# Altium PCB PCB.PcbDoc (part 2 of 2)
Units mil, origin at the board's own origin, x right, y up, seen from the top; angles counter-clockwise.
Board outline 1675.38 x 2135.38 mil, 2 copper layers (Top Layer, Bottom Layer), stack 54.768 mil thick; 71 components, 62 nets, 275 pads, 248 vias.
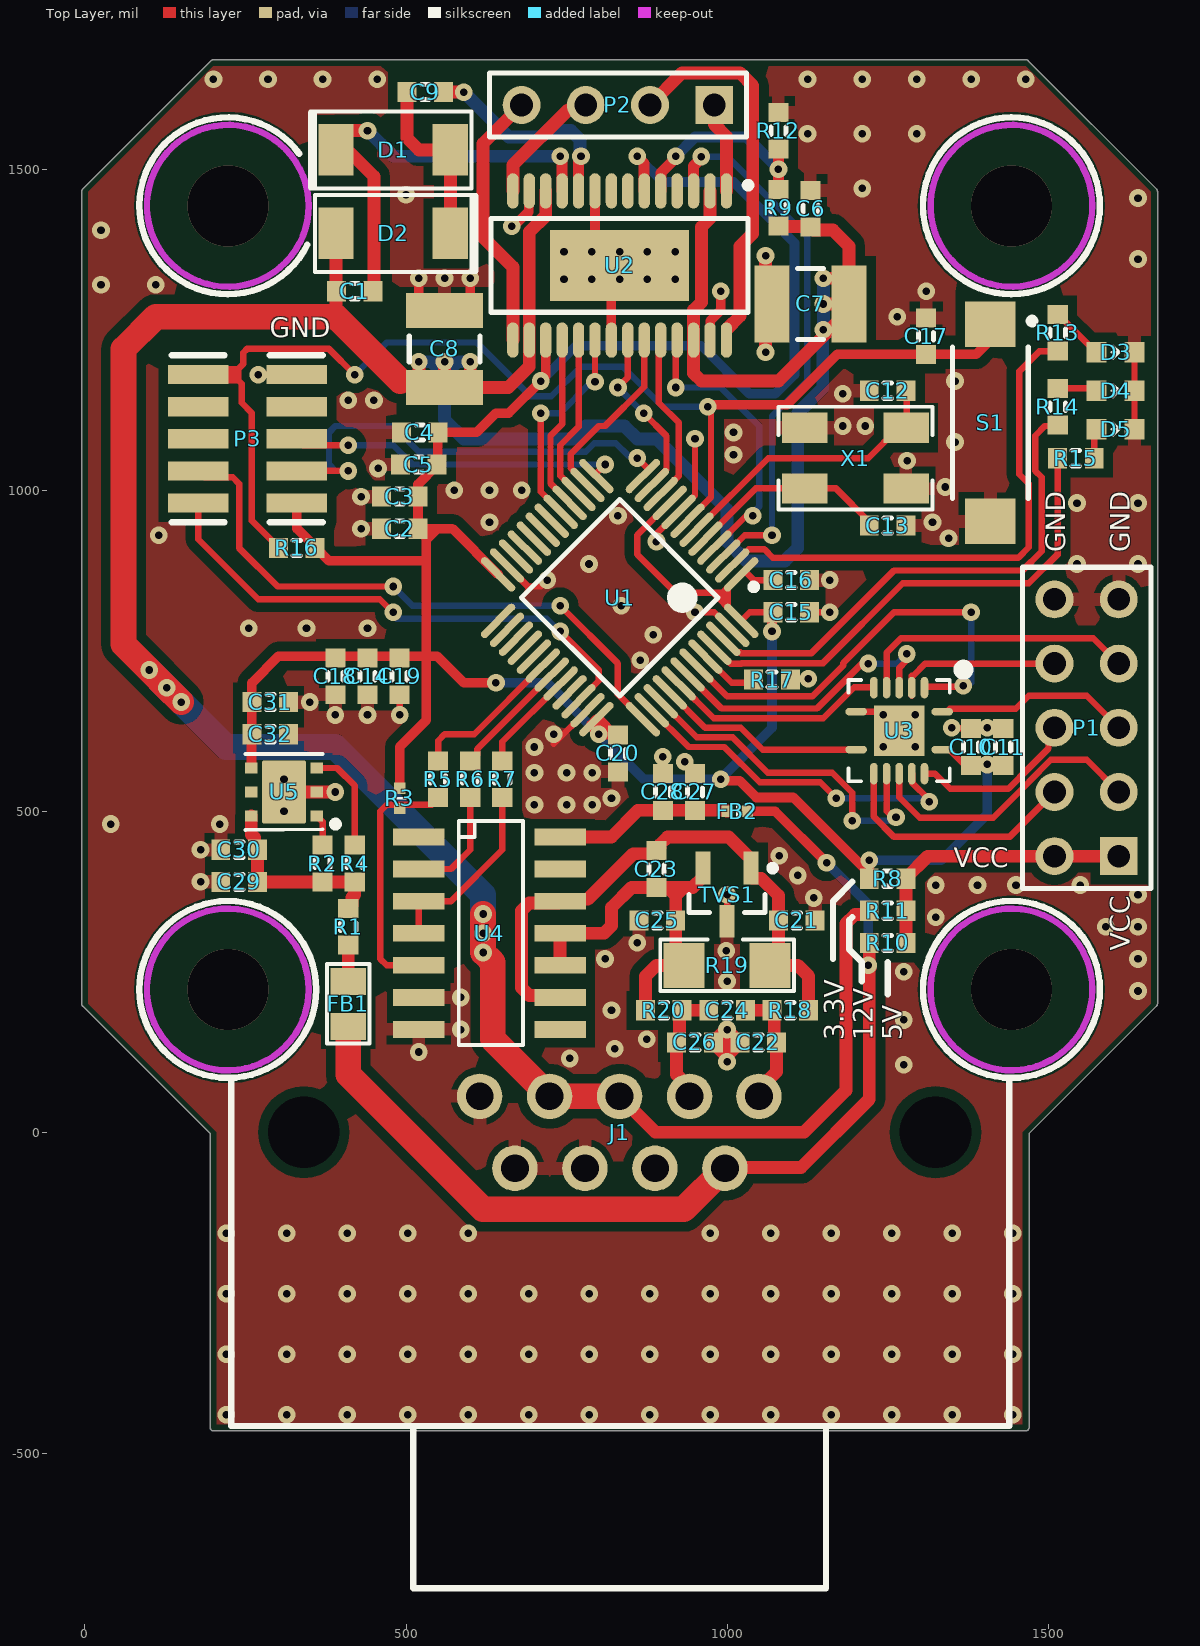
[diagram p0: Top Layer view]

## Polygon pours and split planes (outlines as drawn) (continued)
GND on Bottom Layer "NONET_L02_P-001" (solid, remove dead copper, pour order 2): 200,1660 5,1465 5,200 205,0 205,-455 1460,-455 1460,0 1660,200 1660,1465 1465,1660

## Keep-outs
Keep-Out Layer:
  circle w10: c1442.91,1442.91 r125.98
  circle w10: c222.44,1442.91 r125.98
  circle w10: c222.44,222.44 r125.98
  circle w10: c1442.91,222.44 r125.98

## Silkscreen, mask and mechanical layers (free items; w line width, h text height)
Top Overlay:
  circle w10: c1442.91,1442.91 r137.8
  circle w10: c222.44,222.44 r137.8
  circle w10: c1442.91,222.44 r137.8
  lines w10: 333.77,1524.11 ccw(c222.44,1442.91) 346.02,1381.96 ; 1165,270 1165,360 1195,390 ; 1195,335 1190,330 1190,285 1210,265 1210,235 ; 1250,215 1250,265
  text "GND" at 288,1238 h30
  text "GND" at 1527,903 h30 r90
  text "GND" at 1627,903 h30 r90
  text "VCC" at 1353,413 h30
  text "VCC" at 1627,283 h30 r90
  text "3.3V" at 1182,143 h30 r90
  text "12V" at 1227,143 h30 r90
  text "5V" at 1272,143 h30 r90
Bottom Overlay:
  text "KNE ANG 2020" at 1390,1140 h100
  text "STEPPER_DRIVER_V1" at 1640,961.66 h100
  text "https://github.com/witek117" at 1400,811.66 h50
Mechanical 1:
  lines w10: 0,1465.35 0,200 200,0 200,-460 1465.35,-460 1465.35,0 ; 0,1465.35 200,1665.35 ; 0,1465.35 200,1665.35 ; 200,1665.35 1465.35,1665.35 ; 1465.35,0 1665.35,200 ; 1465.35,0 1665.35,200 ; 1465.35,1665.35 1665.35,1465.35 ; 1465.35,1665.35 1665.35,1465.35 ; 1665.35,200 1665.35,1465.35

## Text inside footprints (layer, text, board x,y; h text height)
C1: Mechanical 17 "d" at 455,1315 h10 r180; Mechanical 19 "-" at 455,1315 h10 r180
C2: Mechanical 17 "d" at 525,945 h10 r180; Mechanical 19 "-" at 525,945 h10 r180
C3: Mechanical 17 "d" at 525,995 h10 r180; Mechanical 19 "-" at 525,995 h10 r180
C4: Mechanical 17 "d" at 556.46,1095 h10 r180; Mechanical 19 "-" at 556.46,1095 h10 r180
C5: Mechanical 17 "d" at 555,1045 h10 r180; Mechanical 19 "-" at 555,1045 h10 r180
C6: Mechanical 17 "d" at 1135,1403.54 h10 r90; Mechanical 19 "-" at 1135,1403.54 h10 r90
C7: Mechanical 17 "d" at 1190,1280 h20 r180; Mechanical 19 "-" at 1190,1320 h20 r180
C8: Mechanical 17 "d" at 550,1160 h20 r90; Mechanical 19 "-" at 590,1160 h20 r90
C9: Mechanical 17 "d" at 495,1615 h10; Mechanical 19 "-" at 495,1615 h10
C10: Mechanical 17 "d" at 1385,565 h10 r90; Mechanical 19 "-" at 1385,565 h10 r90
C11: Mechanical 17 "d" at 1435,565 h10 r90; Mechanical 19 "-" at 1435,565 h10 r90
C12: Mechanical 17 "d" at 1285,1160 h10 r180; Mechanical 19 "-" at 1285,1160 h10 r180
C13: Mechanical 17 "d" at 1215,940 h10; Mechanical 19 "-" at 1215,940 h10
C14: Mechanical 17 "d" at 435,745 h10 r270; Mechanical 19 "-" at 435,745 h10 r270
C15: Mechanical 17 "d" at 1065,805 h10; Mechanical 19 "-" at 1065,805 h10
C16: Mechanical 17 "d" at 1065,855 h10; Mechanical 19 "-" at 1065,855 h10
C17: Mechanical 17 "d" at 1315,1205 h10 r90; Mechanical 19 "-" at 1315,1205 h10 r90
C18: Mechanical 17 "d" at 385,745 h10 r270; Mechanical 19 "-" at 385,745 h10 r270
C19: Mechanical 17 "d" at 485,745 h10 r270; Mechanical 19 "-" at 485,745 h10 r270
C20: Mechanical 17 "d" at 825,625 h10 r270; Mechanical 19 "-" at 825,625 h10 r270
C21: Mechanical 17 "d" at 1073.54,325 h10; Mechanical 19 "-" at 1073.54,325 h10
C22: Mechanical 17 "d" at 1083.54,145 h10 r180; Mechanical 19 "-" at 1083.54,145 h10 r180
C23: Mechanical 17 "d" at 885,445 h10 r270; Mechanical 19 "-" at 885,445 h10 r270
C24: Mechanical 17 "d" at 1035,195 h10 r180; Mechanical 19 "-" at 1035,195 h10 r180
C25: Mechanical 17 "d" at 926.46,335 h10 r180; Mechanical 19 "-" at 926.46,335 h10 r180
C26: Mechanical 17 "d" at 915,135 h10; Mechanical 19 "-" at 915,135 h10
C27: Mechanical 17 "d" at 955,495 h10 r90; Mechanical 19 "-" at 955,495 h10 r90
C28: Mechanical 17 "d" at 905,495 h10 r90; Mechanical 19 "-" at 905,495 h10 r90
C29: Mechanical 17 "d" at 275,395 h10 r180; Mechanical 19 "-" at 275,395 h10 r180
C30: Mechanical 17 "d" at 275,445 h10 r180; Mechanical 19 "-" at 275,445 h10 r180
C31: Mechanical 17 "d" at 253.54,665 h10; Mechanical 19 "-" at 253.54,665 h10
C32: Mechanical 17 "d" at 253.54,615 h10; Mechanical 19 "-" at 253.54,615 h10
D1: Mechanical 17 "d" at 375,1490 h15; Mechanical 19 "-" at 375,1490 h15
D2: Mechanical 17 "d" at 585,1440 h15 r180; Mechanical 19 "-" at 585,1440 h15 r180
D3: Mechanical 17 "d" at 1640,1220 h10 r180; Mechanical 19 "-" at 1640,1220 h10 r180
D4: Mechanical 17 "d" at 1640,1160 h10 r180; Mechanical 19 "-" at 1640,1160 h10 r180
D5: Mechanical 17 "d" at 1640,1100 h10 r180; Mechanical 19 "-" at 1640,1100 h10 r180
FB1: Mechanical 17 "d" at 430,155 h10 r90; Mechanical 19 "-" at 430,155 h10 r90
FB2: Mechanical 17 "d" at 1030.88,504.92 h10 r180; Mechanical 19 "-" at 1030.75,505 h10 r180
J1: Mechanical 17 "d" at 543.68,-33 h60; Mechanical 19 "-" at 550.68,-170 h60
P1: Mechanical 17 "d" at 1570,385 h30 r90; Mechanical 19 "-" at 1570,385 h30 r90
P2: Mechanical 17 "d" at 1015,1630 h60 r180; Mechanical 19 "-" at 1015,1630 h60 r180
P3: Mechanical 17 "d" at 270,960 h30 r90; Mechanical 19 "-" at 270,960 h30 r90
R1: Mechanical 17 "d" at 405,290 h10 r90; Mechanical 19 "-" at 425,290 h10 r90
R2: Mechanical 17 "d" at 365,388.54 h10 r90; Mechanical 19 "-" at 385,388.54 h10 r90
R3: Mechanical 17 "d" at 492.92,488.87 h5.12 r90; Mechanical 19 "-" at 493,489 h5.12 r90
R4: Mechanical 17 "d" at 415,388.54 h10 r90; Mechanical 19 "-" at 435,388.54 h10 r90
R5: Mechanical 17 "d" at 555,580 h10 r270; Mechanical 19 "-" at 535,580 h10 r270
R6: Mechanical 17 "d" at 595,520 h10 r90; Mechanical 19 "-" at 615,520 h10 r90
R7: Mechanical 17 "d" at 655,580 h10 r270; Mechanical 19 "-" at 635,580 h10 r270
R8: Mechanical 17 "d" at 1220,400 h10; Mechanical 19 "-" at 1220,380 h10
R9: Mechanical 17 "d" at 1085,1470 h10 r270; Mechanical 19 "-" at 1065,1470 h10 r270
R10: Mechanical 17 "d" at 1220,300 h10; Mechanical 19 "-" at 1220,280 h10
R11: Mechanical 17 "d" at 1220,350 h10; Mechanical 19 "-" at 1220,330 h10
R12: Mechanical 17 "d" at 1085,1590 h10 r270; Mechanical 19 "-" at 1065,1590 h10 r270
R13: Mechanical 17 "d" at 1510,1215 h10 r90; Mechanical 19 "-" at 1530,1215 h10 r90
R14: Mechanical 17 "d" at 1510,1100 h10 r90; Mechanical 19 "-" at 1530,1100 h10 r90
R15: Mechanical 17 "d" at 1513.31,1054.84 h10; Mechanical 19 "-" at 1513.31,1034.84 h10
R16: Mechanical 17 "d" at 360,905 h10 r180; Mechanical 19 "-" at 360,925 h10 r180
R17: Mechanical 17 "d" at 1100,700 h10 r180; Mechanical 19 "-" at 1100,720 h10 r180
R18: Mechanical 17 "d" at 1068.54,195 h10; Mechanical 19 "-" at 1068.54,175 h10
R19: Mechanical 17 "d" at 935,235 h10; Mechanical 19 "-" at 935,235 h10
R20: Mechanical 17 "d" at 931.46,185 h10 r180; Mechanical 19 "-" at 931.46,205 h10 r180
S1: Mechanical 17 "d" at 1360,1235 h25 r270; Mechanical 19 "-" at 1360,1235 h25 r270
TVS1: Mechanical 17 "d" at 1045,375 h15 r180; Mechanical 19 "-" at 1045,375 h15 r180
U1: Mechanical 17 "d" at 896.32,910.46 h25 r225; Mechanical 19 "-" at 896.32,910.46 h25 r225
U2: Mechanical 17 "d" at 822.68,1395 h25 r270; Mechanical 19 "-" at 822.68,1390 h25 r270
U3: Mechanical 17 "d" at 1363.07,690.47 h25 r180; Mechanical 19 "-" at 1363.07,690.47 h25 r180
U4: Mechanical 17 "d" at 615,475 h20 r270; Mechanical 19 "-" at 615,475 h20 r270
U5: Mechanical 17 "d" at 320,485 h25 r90; Mechanical 19 "-" at 320,485 h25 r90
X1: Mechanical 17 "d" at 1110,1035 h25; Mechanical 19 "-" at 1110,1035 h25